# Altium PCB DIOT_Sampler_Adapter.PCBDOC
Units mm, origin at the board's own origin, x right, y up, seen from the top; angles counter-clockwise.
Board outline 33.63 x 98 mm, 4 copper layers (Top, GP1(GND), L3, Bot), stack 1.648 mm thick; 6 components, 9 nets, 26 pads, 0 vias.
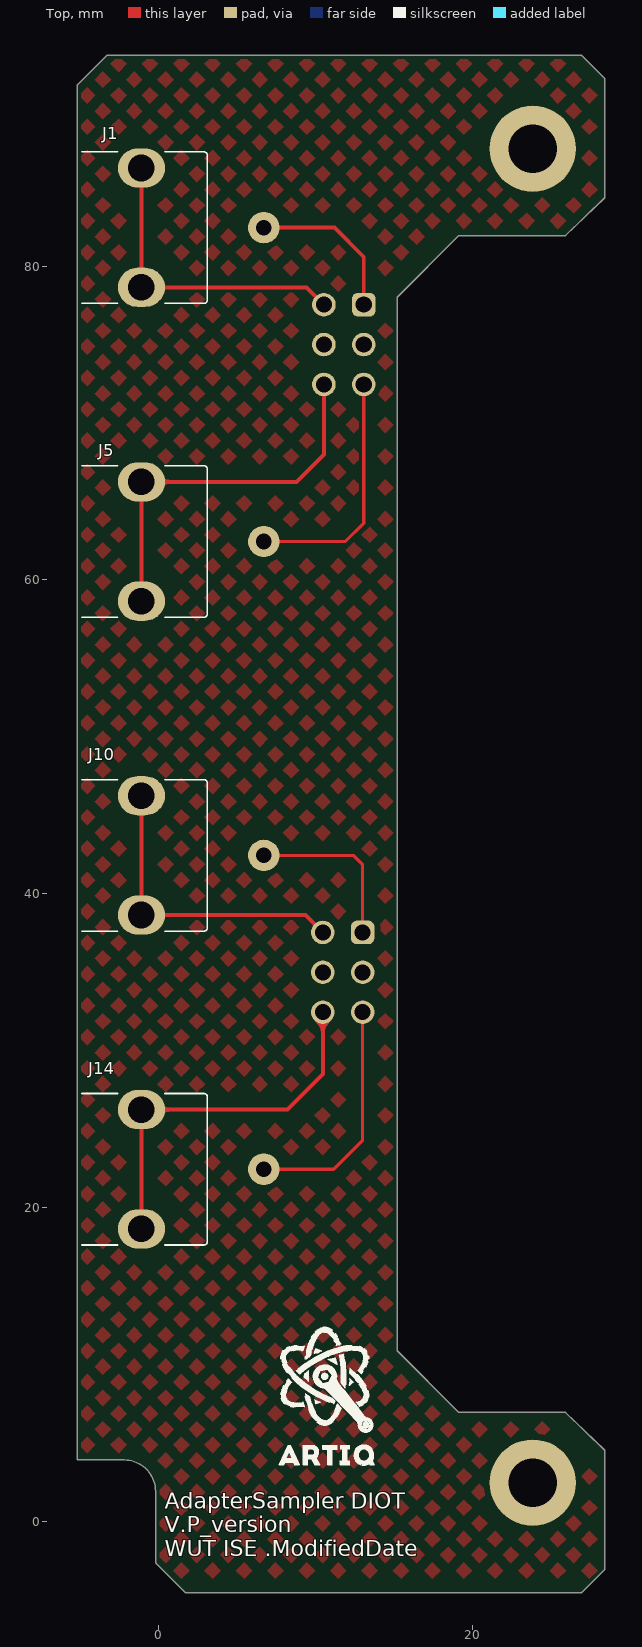
[diagram p0: Top view]
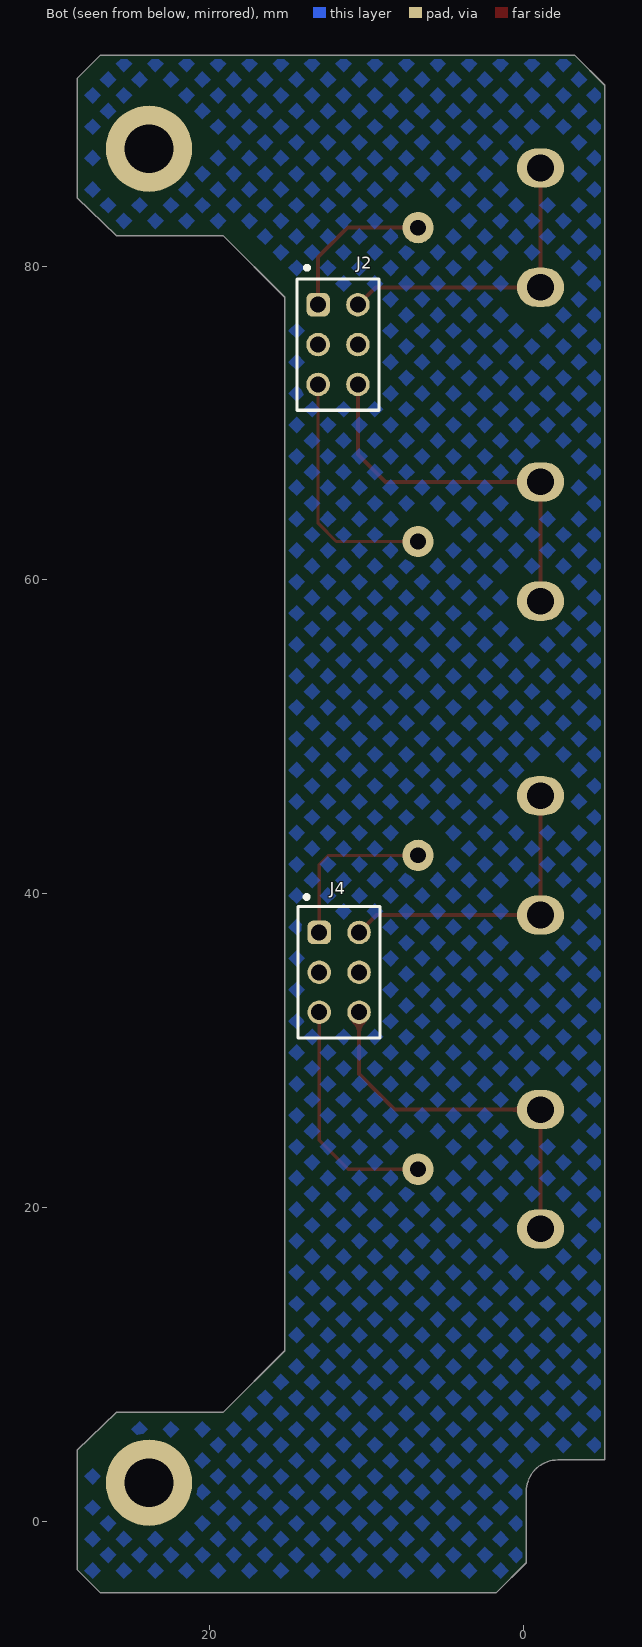
[diagram p1: Bot view, seen from below]
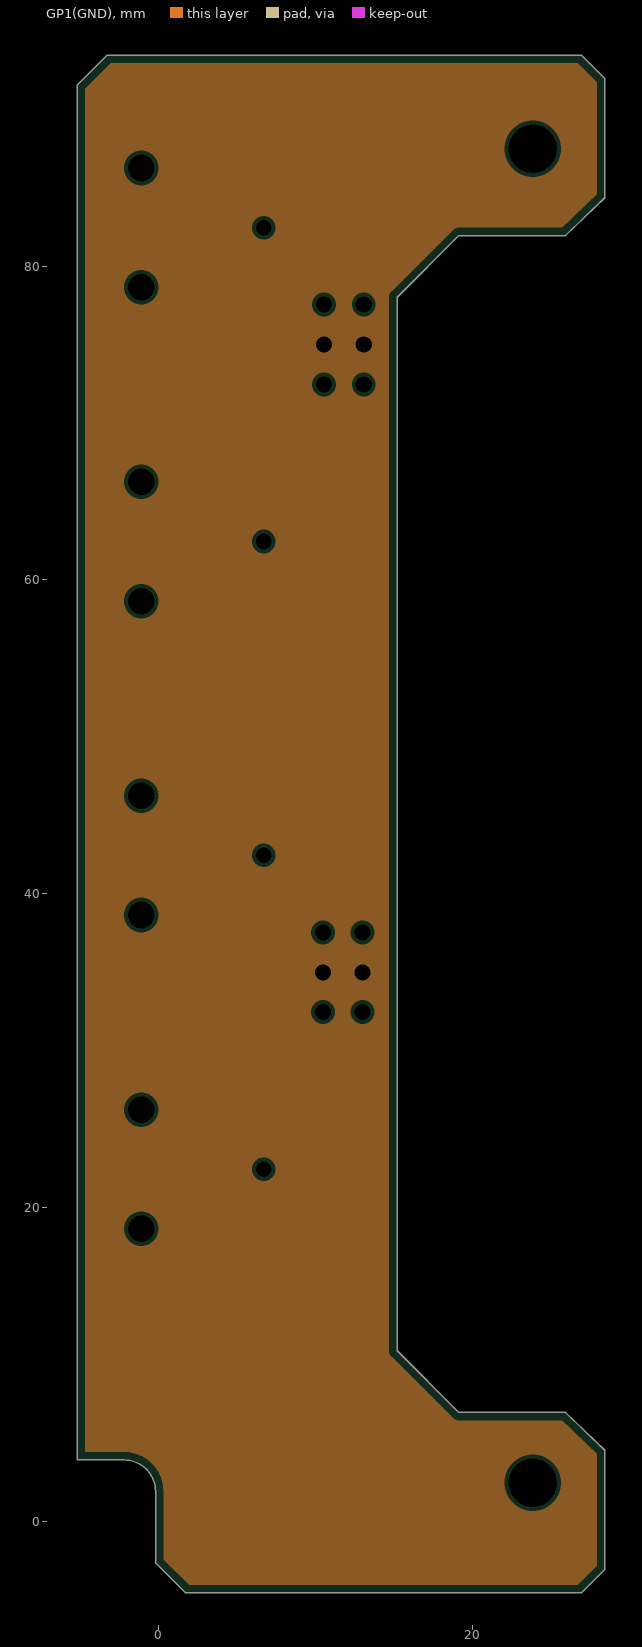
[diagram p2: GP1(GND), clearances drawn from the general rule]
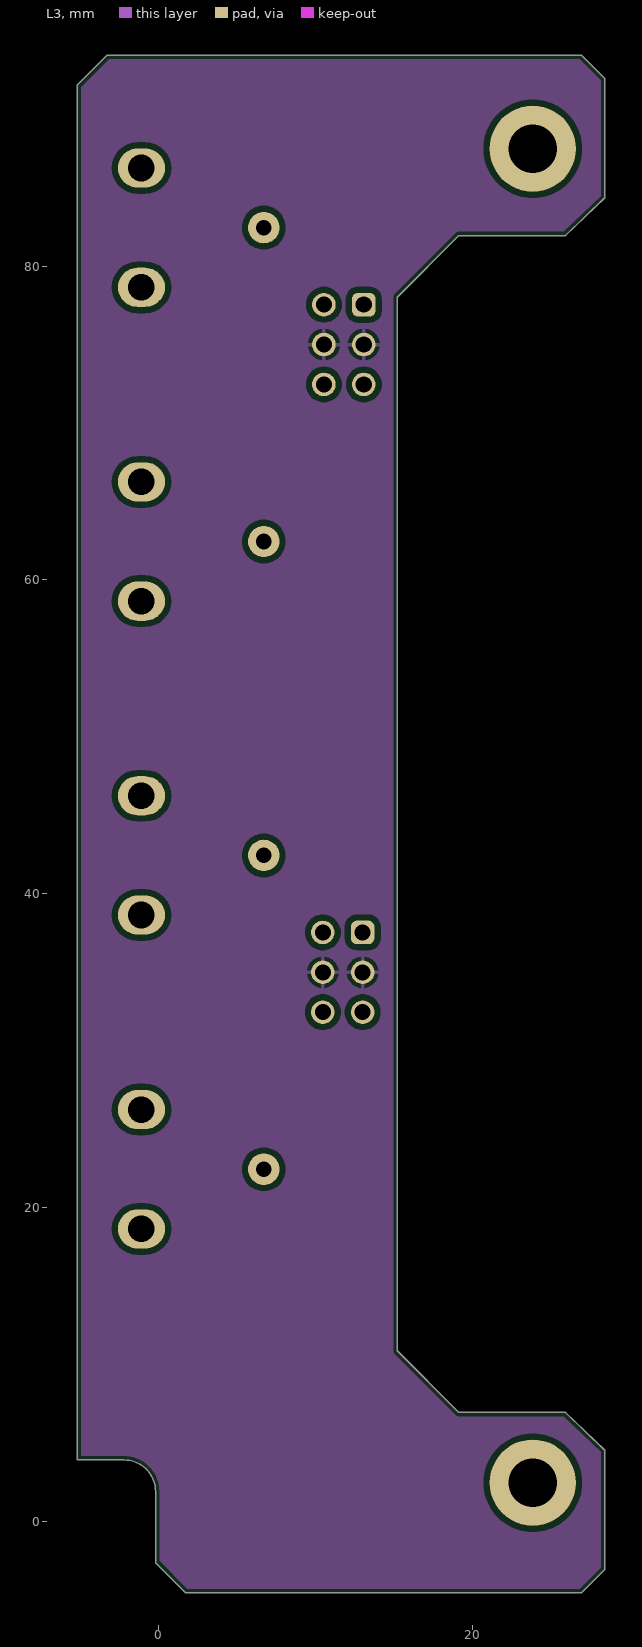
[diagram p3: L3]
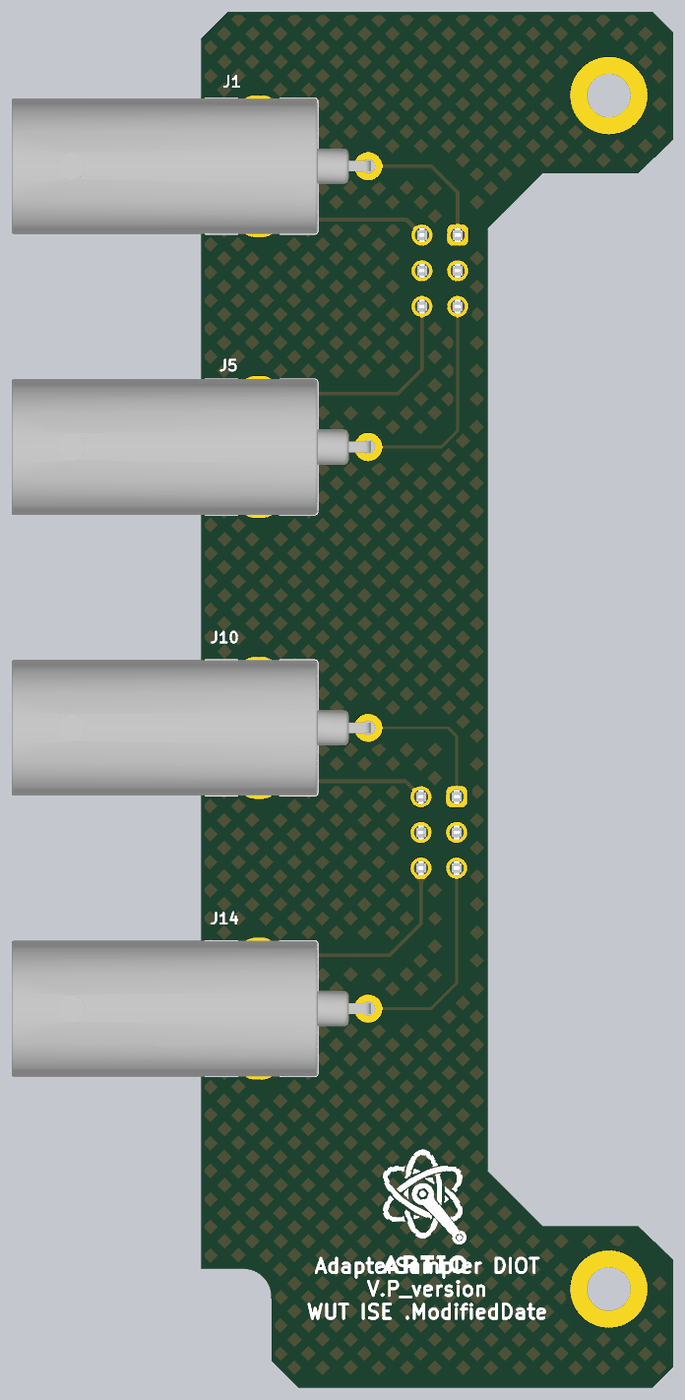
[diagram p4: 3D render of the assembled board from above, using the file's embedded part models]

## Layer stack, top to bottom
TopSolder: solder mask 0.0102, Solder Resist, Dk 3.5
Top: signal copper 0.058
Dielectric1: core 0.18, FR-4, Dk 4.8
GP1(GND): plane copper 0.036, net GND
Dielectric 3: prepreg 1.1, Dk 4.2
L3: signal copper 0.036
Dielectric2: core 0.18, FR-4, Dk 4.2
Bot: signal copper 0.058
BottomSolder: solder mask 0.0102, Solder Resist, Dk 3.5

## Board outline
-0.2,1.925 ccw(c-2.2,1.925) -2.2,3.925 -5.2,3.925 -5.2,91.519 -3.269,93.45 26.93,93.45 28.43,91.95 28.43,84.35 25.93,81.95 19.13,81.95 15.2,78.02 15.2,10.88 19.13,6.95 25.93,6.95 28.43,4.55 28.43,-3.05 26.93,-4.55 1.731,-4.55 -0.2,-2.619

## Design rules (kind name [scope] priority, off if disabled: settings)
AcuteAngle [All] p1: minimum=6.00000000000000E+0001 checktracksonly=FALSE
BoardOutlineClearance [All] p1: gap=0.254 ignorepadtopadclearanceinfootprint=FALSE except(0: Arc-SplitContinuation Track-SplitContinuation SMDPad-SplitContinuation THPad-SplitContinuation Via-SplitContinuation Fill-SplitContinuation Poly-SplitContinuation Region-SplitContinuation Text-SplitContinuation)
Clearance Clearance_DIFF [(InDifferentialPairClass('All Differential Pairs'))] p1: gap=0.127 ignorepadtopadclearanceinfootprint=FALSE except(0: Arc-Hole Track-Hole SMDPad-Hole THPad-Hole Via-Hole Fill-Hole Poly-Hole Region-Hole Text-Hole; 0.254: Arc-Poly Track-Poly SMDPad-Poly THPad-Poly Via-Poly Fill-Poly Poly-Poly Poly-Region Poly-Text)
Clearance [All] p2: gap=0.127 ignorepadtopadclearanceinfootprint=FALSE except(0: Arc-Hole Track-Hole SMDPad-Hole THPad-Hole Via-Hole Fill-Hole Poly-Hole Region-Hole Text-Hole; 0.203: Track-Poly; 0.381: Arc-Poly SMDPad-Poly THPad-Poly Via-Poly Fill-Poly Poly-Poly)
ComponentClearance [All] p1 off: gap=0.254 collisioncheckmode=3 verticalgap=0.254 showdistances=FALSE
DiffPairsRouting [All] p1: maxlimit=0.178 minlimit=0.152 mostfreqgap=0.152 toplayer_minwidth=0.127 toplayer_maxwidth=0.152 toplayer_prefwidth=0.152 midlayer1_minwidth=0.127 midlayer1_maxwidth=0.152 midlayer1_prefwidth=0.152 bottomlayer_minwidth=0.127 bottomlayer_maxwidth=0.152 bottomlayer_prefwidth=0.152 maxuncoupledlength=12.7
FabricationTestPointUsage TestPointUsage [All] p1: valid=0 allowmultiple=FALSE
FabricationTestpoint Testpoint [All] p1: side=3 testpointundercomponent=TRUE minsize=1.016 maxsize=2.54 preferedsize=1.524 minholesize=0.508 maxholesize=1.016 preferedholesize=0.813 testpointgrid=0.025 allowsidetop=TRUE allowsidebottom=TRUE usegrid=TRUE gridtolerance=0
Height [All] p1 off: minheight=0 maxheight=25.4 prefheight=12.7
HoleSize [All] p1: absolutevalues=TRUE maxlimit=3.81 minlimit=0.025 maxpercent=80.000 minpercent=20.000
HoleToHoleClearance [All] p1: gap=0.025 allowstackedmicrovias=TRUE
MinimumSolderMaskSliver [All] p1: minsoldermaskwidth=0
PlaneClearance [All] p1: clearance=0.254
PlaneConnect [All] p1: planeconnectstyle=Direct reliefexpansion=0.508 reliefentries=4 reliefconductorwidth=0.254 reliefairgap=0.254
PolygonConnect PolygonConnect_pad [(InPadClass('All Pads'))] p1: connectstyle=Relief reliefconductorwidth=0.254 reliefentries=4 polygonreliefangle="90 Angle" airgapwidth=0.254
PolygonConnect [All] p2: connectstyle=Direct reliefconductorwidth=0.254 reliefentries=4 polygonreliefangle="45 Angle" airgapwidth=0.254
RoutingVias [All] p1: holewidth=0.2 width=0.5 viastyle="Through Hole" minholewidth=0.2 minwidth=0.5 maxholewidth=0.711 maxwidth=1.27
SilkToSilkClearance [All] p1: silktosilkclearance=0
SilkToSolderMaskClearance SilkscreenOverComponentPads [IsPad] p1: minsilkscreentomaskgap=0 clearancetoexposedcopper=TRUE
SolderMaskExpansion [All] p1: expansion=0.051 istentingtop=FALSE
SupplyNets "Schematic Supply Nets_10" [InNet('GND')] p1: voltage=0.000
Width [All] p1: maxlimit=1.27 minlimit=0.127 preferedwidth=0.127
18 further rules are at their usual default settings.

## Components (designator, comment, footprint, x,y, rotation, side; value= is the part's Value field where it differs from the comment)
J1 "BNC" MOLEX_73251-3150 6.7,82.45 r0 top
J2 "61300621821" 61300621821 11.8,75 r270 bottom
J4 "61300621821" 61300621821 11.73,35 r270 bottom
J5 "BNC" MOLEX_73251-3150 6.7,62.45 r0 top
J10 "BNC" MOLEX_73251-3150 6.7,42.45 r0 top
J14 "BNC" MOLEX_73251-3150 6.7,22.45 r0 top

## Footprints (in the part's own frame and the unit in brackets; to place one, negate y for a bottom-side part, rotate by r counter-clockwise, add the part's x,y. Pads: shape width x height; smd on the part's side, far side on the other; paste and mask are expansions set on the pad)
61300621821 [mm] "Socket Header, Pitch 2.54 mm, THT, Vertical, dual row, 6p"
  rrect50% 1.5x1.5 hole 1.02: 1(-2.54,-1.27)
  round 1.5 hole 1.02: 2(-2.54,1.27) 3(0,-1.27) 4(0,1.27) 5(2.54,-1.27) 6(2.54,1.27)
  silkscreen extent -5.02,-2.62 4.19,2.62, body extent -4.06,-2.54 4.06,2.54, height 8.45
MOLEX_73251-3150 [mm]
  round 2 hole 1: 1(0,0)
  oval 3x2.5 hole 1.7: 2(-7.8,-3.8) 2(-7.8,3.8)
  silkscreen extent -11.6,-4.83 -3.6,4.83, body extent -25.4,-4.82 0.15,4.82, height 9.3

## Part data
J1 J5 J10 J14: library part MOLEX_73251-3150, Manufacturer=MOLEX, Manufacturer Part Number=73251-3150, Author="CERN DEM JLC", Component Type=Standard, CreateDate=19.09.2024, Family=BNC, HelpURL=\\cern.ch\dfs\Applications\Altium\Datasheets\MOLEX_73251-2121.pdf, LatestRevisionDate=19.09.2024, Mounted=Yes, Part Description="RF Connectors / Coaxial Connectors BNC RA PCB RECPT 50 OHM", Part Number=MOLEX_73251-3150, Pin Count=5, PressFit=No, Sense=No, SMD=No, Socket=No, Status=None
J2 J4: "WR-PHD Socket Header, THT, Vertical, pitch 2.54mm, 2 Row, 6P", Contact Resistance=20mOhm, Manufacturer="Wurth Elektronik", Operating Temperature Max=125°C, Operating Temperature Min=-40°C, Rated Current=3A, Withstanding Voltage=500V, Working Voltage=250V, Category="Board-to-Board Connectors", ComponentLink1Description="Website Link", ComponentLink1URL=https://www.we-online.com/redexpert/article/61300621821?ad, ComponentLink2Description="Datasheet Link", ComponentLink2URL=https://www.we-online.com/redexpert/spec/61300621821?ad, Gender="Socket Header", Manufacturer Part Number=61300621821, Match Code=WR-PHD, Mount="Through Hole", Number of Pins=6, Number of Rows=2, Orientation=Vertical, Packaging=Tray, Pitch=2.54mm

## Free pads (board coordinates)
  round 5.5 hole 3.1: MH(23.844,2.48) MH(23.844,87.48)

## Nets (pads, with @x,y where several pads share a name; then routed paths per layer and width w, separated by ;. In a path a pad name is that pad's centre, name@x,y a point inside that pad or via, vN(x,y) a via of type N, cw(c..) or ccw(c..) an arc to the next point about the centre after c; other vN are vias at no path point)
ADC_IN_N0: J1.2 J2.2 | length 19.7
  Top w0.254: J1.2@-1.1,86.25 -1.1,78.65 9.42,78.65 J2.2
ADC_IN_N2: J2.6 J5.2 | length 24.4
  Top w0.254: J5.2@-1.1,58.65 -1.1,66.25 8.775,66.25 10.53,68.005 J2.6
ADC_IN_N4: J4.2 J10.2 | length 19.6
  Top w0.254: J10.2@-1.1,46.25 -1.1,38.65 9.35,38.65 J4.2
ADC_IN_N6: J4.6 J14.2 | length 24
  Top w0.254: J14.2@-1.1,18.65 -1.1,26.25 8.2,26.25 10.46,28.51 J4.6
ADC_IN_P0: J1.1 J2.1 | length 10.2
  Top w0.254: J1.1 11.2,82.45 13.07,80.58 J2.1
ADC_IN_P2: J2.5 J5.1 | length 15.7
  Top w0.203: J5.1 11.9,62.45 13.07,63.62 J2.5
ADC_IN_P4: J4.1 J10.1 | length 10.9
  Top w0.203: J10.1 12.4,42.45 13,41.85 J4.1
ADC_IN_P6: J4.5 J14.1 | length 15.2
  Top w0.203: J14.1 11.15,22.45 13,24.3 J4.5
GND: J2.3 J2.4 J4.3 J4.4

## Polygon pours and split planes (outlines as drawn)
GND on Bot "GND_L04_P033" (solid, pour order 33): -2.269,94.45 -5.2,91.519 -5.2,-2.619 -2.269,-5.55 25.93,-5.55 28.43,-3.05 28.43,4.55 28.33,4.55 25.93,6.95 19.13,6.95 15.2,10.88 15.2,78.02 19.13,81.95 26.03,81.95 28.43,84.35 28.43,91.95 25.93,94.45
GND on L3 "GND_L03_P032" (solid, pour order 32): -2.269,94.45 -5.2,91.519 -5.2,-2.619 -2.269,-5.55 25.93,-5.55 28.43,-3.05 28.43,4.55 28.33,4.55 25.93,6.95 19.13,6.95 15.2,10.88 15.2,78.02 19.13,81.95 26.03,81.95 28.43,84.35 28.43,91.95 25.93,94.45
GND on Top "GND_L01_P028" (solid, pour order 28): -2.269,94.45 -5.2,91.519 -5.2,-2.619 -2.269,-5.55 25.93,-5.55 28.43,-3.05 28.43,4.55 28.33,4.55 25.93,6.95 19.13,6.95 15.2,10.88 15.2,78.02 19.13,81.95 26.03,81.95 28.43,84.35 28.43,91.95 25.93,94.45
GND on GP1(GND) (split plane): 27.92,91.739 27.92,84.568 25.725,82.46 19.13,82.46 19.03,82.451 18.935,82.422 18.846,82.374 18.769,82.311 14.839,78.381 14.776,78.304 14.728,78.215 14.699,78.12 14.69,78.02 14.69,10.88 14.699,10.78 14.728,10.685 14.776,10.596 14.839,10.519 18.769,6.589 18.846,6.526 18.935,6.478 19.03,6.449 19.13,6.44 25.725,6.44 27.92,4.332 27.92,-2.839 26.719,-4.04 1.942,-4.04 0.31,-2.408 0.31,1.925 0.31,1.926 0.301,2.144 0.272,2.361 0.225,2.575 0.159,2.784 0.075,2.986 -0.026,3.18 -0.144,3.365 -0.277,3.539 -0.425,3.7 -0.586,3.848 -0.76,3.981 -0.945,4.099 -1.139,4.2 -1.341,4.284 -1.55,4.35 -1.764,4.397 -1.981,4.426 -2.199,4.435 -2.2,4.435 -4.69,4.435 -4.69,91.308 -3.058,92.94 26.719,92.94

## Keep-outs
KeepOutLayer:
  lines w0.254: -13.883,165.207 14.444,136.88 ; -13.883,167.207 14.444,138.88 ; -13.883,197.207 14.444,168.88 ; -13.883,199.207 14.444,170.88 ; -13.883,229.207 14.444,200.88 ; -13.883,231.207 14.444,202.88 ; -13.883,261.207 14.444,232.88 ; -13.883,263.207 14.444,234.88 ; -13.883,289.207 14.444,260.88 ; -13.883,291.207 14.444,262.88 ; -13.556,134.88 14.444,162.88 ; -13.556,164.88 -9.556,168.88 14.444,192.88 ; -13.556,166.88 14.444,194.88 ; -13.556,196.88 -9.556,200.88 14.444,224.88 ; -13.556,198.88 14.444,226.88 ; -13.556,228.88 -9.556,232.88 14.444,256.88 ; -13.556,230.88 14.444,258.88 ; -13.556,288.88 -9.556,292.88 ; -13.556,292.88 -11.556,290.88 14.444,264.88 ; -11.556,134.88 -13.556,136.88 14.444,164.88 ; -11.556,136.88 -13.556,138.88 14.444,166.88 ; -11.556,258.88 -13.556,260.88 ; -11.556,260.88 -13.556,262.88 14.444,290.88 ; -11.556,262.88 14.444,236.88 ; -11.556,264.88 14.444,238.88 ; -11.556,292.88 14.444,266.88 ; -9.556,134.88 14.444,158.88 ; -9.556,136.88 14.444,160.88 ; -9.556,258.88 14.444,282.88 ; -9.556,260.88 14.444,284.88 ; -9.556,262.88 -13.556,258.88 ; -9.556,264.88 -13.556,260.88 ; -9.556,290.88 -13.556,286.88 12.444,260.88 ; -7.556,134.88 -13.556,140.88 14.444,168.88 ; -7.556,136.88 -13.556,142.88 10.444,166.88 ; -7.556,258.88 -13.556,264.88 14.444,292.88 ; -7.556,260.88 -13.556,266.88 10.444,290.88 ; -7.556,262.88 14.444,240.88 ; -7.556,264.88 14.444,242.88 ; -7.556,290.88 14.444,268.88 ; -7.556,292.88 14.444,270.88 ; -5.556,134.88 14.444,154.88 ; -5.556,136.88 14.444,156.88 ; -5.556,258.88 14.444,278.88 ; -5.556,260.88 14.444,280.88 ; -5.556,262.88 -13.556,254.88 8.444,232.88 14.444,226.88 ; -5.556,264.88 -13.556,256.88 12.444,230.88 14.444,228.88 ; -5.556,290.88 -13.556,282.88 8.444,260.88 ; -5.556,292.88 -13.556,284.88 12.444,258.88 ; -3.556,134.88 -13.556,144.88 10.444,168.88 ; -3.556,136.88 -13.556,146.88 -11.556,148.88 ; -3.556,258.88 -13.556,268.88 10.444,292.88 ; -3.556,260.88 -13.556,270.88 -11.556,272.88 ; -1.556,134.88 14.444,150.88 ; -1.556,136.88 14.444,152.88 ; -1.556,258.88 14.444,274.88 ; -1.556,260.88 14.444,276.88 ; 0.444,134.88 -13.556,148.88 -11.556,150.88 ; 0.444,136.88 -13.556,150.88 -11.556,152.88 ; 0.444,258.88 -13.556,272.88 -11.556,274.88 ; 0.444,260.88 -13.556,274.88 -11.556,276.88 ; 0.444,262.88 14.444,248.88 ; 0.444,264.88 14.444,250.88 ; 0.444,290.88 14.444,276.88 ; 0.444,292.88 14.444,278.88 ; 2.444,134.88 14.444,146.88 ; 2.444,136.88 14.444,148.88 ; 2.444,258.88 14.444,270.88 ; 2.444,260.88 14.444,272.88 ; 2.444,262.88 -11.556,248.88 ; 2.444,264.88 -11.556,250.88 ; 2.444,290.88 -11.556,276.88 ; 2.444,292.88 -11.556,278.88 ; 4.444,134.88 -13.556,152.88 -11.556,154.88 ; 4.444,136.88 -13.556,154.88 -1.556,166.88 ; 4.444,258.88 -13.556,276.88 -11.556,278.88 ; 4.444,260.88 -13.556,278.88 -1.556,290.88 ; 6.444,134.88 14.444,142.88 ; 6.444,136.88 14.444,144.88 ; 6.444,258.88 14.444,266.88 ; 6.444,260.88 14.444,268.88 ; 6.444,262.88 -11.556,244.88 ; 6.444,264.88 -11.556,246.88 ; 6.444,290.88 -11.556,272.88 ; 6.444,292.88 -11.556,274.88 ; 8.444,134.88 -13.556,156.88 -1.556,168.88 ; 8.444,136.88 -13.556,158.88 -5.556,166.88 14.444,186.88 ; 8.444,258.88 -13.556,280.88 -1.556,292.88 ; 8.444,262.88 14.444,256.88 ; 8.444,264.88 14.444,258.88 ; 8.444,290.88 14.444,284.88 ; 8.444,292.88 14.444,286.88 ; 10.444,134.88 14.444,138.88 ; 10.444,136.88 14.444,140.88 ; 10.444,258.88 14.444,262.88 ; 10.444,260.88 14.444,264.88 ; 12.444,134.88 -13.556,160.88 -5.556,168.88 14.444,188.88 ; 12.444,136.88 -13.556,162.88 -9.556,166.88 14.444,190.88 ; 12.444,262.88 14.444,260.88 ; 12.444,264.88 14.444,262.88 ; 12.444,290.88 14.444,288.88 ; 12.444,292.88 14.444,290.88 ; 14.117,165.207 42.444,136.88 ; 14.117,167.207 42.444,138.88 ; 14.117,197.207 42.444,168.88 ; 14.117,199.207 42.444,170.88 ; 14.117,229.207 42.444,200.88 ; 14.117,231.207 42.444,202.88 ; 14.117,261.207 42.444,232.88 ; 14.117,263.207 42.444,234.88 ; 14.117,289.207 42.444,260.88 ; 14.117,291.207 42.444,262.88 ; 14.444,134.88 42.444,162.88 ; 16.444,134.88 14.444,136.88 ; 16.444,136.88 14.444,138.88 ; 16.444,258.88 14.444,260.88 ; 16.444,260.88 14.444,262.88 ; 16.444,262.88 42.444,236.88 ; 16.444,264.88 42.444,238.88 ; 16.444,292.88 42.444,266.88 ; 18.444,134.88 42.444,158.88 ; 18.444,136.88 42.444,160.88 ; 18.444,258.88 42.444,282.88 ; 18.444,260.88 42.444,284.88 ; 18.444,262.88 14.444,258.88 ; 18.444,264.88 14.444,260.88 ; 18.444,290.88 14.444,286.88 ; 18.444,292.88 14.444,288.88 ; 20.444,134.88 14.444,140.88 ; 20.444,136.88 14.444,142.88 ; 20.444,258.88 14.444,264.88 ; 20.444,260.88 14.444,266.88 ; 20.444,262.88 42.444,240.88 ; 20.444,264.88 42.444,242.88 ; 20.444,290.88 42.444,268.88 ; 20.444,292.88 42.444,270.88 ; 22.444,134.88 42.444,154.88 ; 22.444,136.88 42.444,156.88 ; 22.444,258.88 42.444,278.88 ; 22.444,260.88 42.444,280.88 ; 22.444,262.88 14.444,254.88 ; 22.444,264.88 14.444,256.88 ; 22.444,290.88 14.444,282.88 ; 22.444,292.88 14.444,284.88 ; 24.444,134.88 14.444,144.88 ; 24.444,136.88 14.444,146.88 ; 24.444,258.88 14.444,268.88 ; 24.444,260.88 14.444,270.88 ; 26.444,134.88 42.444,150.88 ; 26.444,136.88 42.444,152.88 ; 26.444,258.88 42.444,274.88 ; 26.444,260.88 42.444,276.88 ; 28.444,134.88 14.444,148.88 ; 28.444,136.88 14.444,150.88 ; 28.444,258.88 14.444,272.88 ; 28.444,260.88 14.444,274.88 ; 28.444,262.88 42.444,248.88 ; 28.444,264.88 42.444,250.88 ; 28.444,290.88 42.444,276.88 ; 28.444,292.88 42.444,278.88 ; 30.444,134.88 42.444,146.88 ; 30.444,136.88 42.444,148.88 ; 30.444,258.88 42.444,270.88 ; 30.444,260.88 42.444,272.88 ; 30.444,262.88 16.444,248.88 ; 30.444,264.88 16.444,250.88 ; 30.444,290.88 16.444,276.88 ; 30.444,292.88 16.444,278.88 ; 32.444,134.88 14.444,152.88 ; 32.444,136.88 14.444,154.88 ; 32.444,258.88 14.444,276.88 ; 32.444,260.88 14.444,278.88 ; 34.444,134.88 42.444,142.88 ; 34.444,136.88 42.444,144.88 ; 34.444,258.88 42.444,266.88 ; 34.444,260.88 42.444,268.88 ; 34.444,262.88 16.444,244.88 ; 34.444,264.88 16.444,246.88 ; 34.444,290.88 16.444,272.88 ; 34.444,292.88 16.444,274.88 ; 36.444,134.88 14.444,156.88 ; 36.444,136.88 14.444,158.88 ; 36.444,258.88 14.444,280.88 ; 36.444,260.88 14.444,282.88 ; 36.444,262.88 42.444,256.88 ; 36.444,264.88 42.444,258.88 ; 36.444,290.88 42.444,284.88 ; 36.444,292.88 42.444,286.88 ; 38.444,134.88 42.444,138.88 ; 38.444,136.88 42.444,140.88 ; 38.444,258.88 42.444,262.88 ; 38.444,260.88 42.444,264.88 ; 40.444,134.88 14.444,160.88 ; 40.444,136.88 14.444,162.88 ; 40.444,258.88 14.444,284.88 ; 40.444,260.88 14.444,286.88 ; 40.444,262.88 42.444,260.88 ; 40.444,264.88 42.444,262.88 ; 40.444,290.88 42.444,288.88 ; 40.444,292.88 42.444,290.88 ; 42.117,165.207 70.444,136.88 ; 42.117,167.207 70.444,138.88 ; 42.117,197.207 70.444,168.88 42.444,140.88 ; 42.117,199.207 70.444,170.88 ; 42.117,229.207 70.444,200.88 42.444,172.88 ; 42.117,231.207 70.444,202.88 ; 42.117,261.207 70.444,232.88 42.444,204.88 ; 42.117,263.207 70.444,234.88 ; 42.117,289.207 70.444,260.88 42.444,232.88 ; 42.117,291.207 70.444,262.88 42.444,234.88 ; 42.444,134.88 70.444,162.88 ; 44.444,134.88 42.444,136.88 ; 44.444,136.88 42.444,138.88 ; 44.444,258.88 42.444,260.88 ; 44.444,260.88 42.444,262.88 ; 44.444,262.88 70.444,236.88 ; 44.444,264.88 70.444,238.88 ; 44.444,292.88 70.444,266.88 ; 46.444,134.88 70.444,158.88 60.444,168.88 ; 46.444,136.88 70.444,160.88 ; 46.444,258.88 70.444,282.88 60.444,292.88 ; 46.444,260.88 70.444,284.88 ; 46.444,262.88 42.444,258.88 ; 46.444,264.88 42.444,260.88 ; 46.444,290.88 42.444,286.88 ; 46.444,292.88 42.444,288.88 ; 48.444,134.88 42.444,140.88 ; 48.444,136.88 42.444,142.88 ; 48.444,258.88 42.444,264.88 ; 48.444,260.88 42.444,266.88 ; 48.444,262.88 70.444,240.88 ; 48.444,264.88 70.444,242.88 58.444,230.88 44.444,216.88 ; 48.444,290.88 70.444,268.88 ; 48.444,292.88 70.444,270.88 58.444,258.88 ; 50.444,134.88 70.444,154.88 56.444,168.88 42.444,182.88 ; 50.444,136.88 70.444,156.88 60.444,166.88 ; 50.444,258.88 70.444,278.88 56.444,292.88 ; 50.444,260.88 70.444,280.88 60.444,290.88 ; 50.444,262.88 42.444,254.88 ; 50.444,264.88 42.444,256.88 ; 50.444,290.88 42.444,282.88 ; 50.444,292.88 42.444,284.88 ; 52.444,134.88 42.444,144.88 ; 52.444,136.88 42.444,146.88 ; 52.444,258.88 42.444,268.88 ; 52.444,260.88 42.444,270.88 ; 54.444,134.88 70.444,150.88 52.444,168.88 ; 54.444,136.88 70.444,152.88 56.444,166.88 42.444,180.88 ; 54.444,258.88 70.444,274.88 52.444,292.88 ; 54.444,260.88 70.444,276.88 56.444,290.88 ; 56.444,134.88 42.444,148.88 ; 56.444,136.88 42.444,150.88 ; 56.444,258.88 42.444,272.88 ; 56.444,260.88 42.444,274.88 ; 56.444,262.88 70.444,248.88 54.444,232.88 ; 56.444,264.88 70.444,250.88 50.444,230.88 42.444,222.88 ; 58.444,134.88 70.444,146.88 48.444,168.88 42.444,174.88 ; 58.444,136.88 70.444,148.88 52.444,166.88 ; 58.444,260.88 70.444,272.88 52.444,290.88 ; 58.444,262.88 44.444,248.88 ; 58.444,264.88 44.444,250.88 ; 58.444,290.88 44.444,276.88 ; 58.444,292.88 44.444,278.88 ; 60.444,134.88 42.444,152.88 ; 60.444,136.88 42.444,154.88 ; 60.444,258.88 42.444,276.88 ; 60.444,260.88 42.444,278.88 ; 62.444,290.88 44.444,272.88 ; 62.444,292.88 44.444,274.88 ; 62.444,166.88 44.444,148.88 ; 62.444,168.88 44.444,150.88 ; 62.444,198.88 44.444,180.88 ; 62.444,200.88 44.444,182.88 ; 62.444,230.88 44.444,212.88 ; 62.444,232.88 44.444,214.88 ; 62.444,262.88 44.444,244.88 ; 62.444,264.88 44.444,246.88 ; 64.444,134.88 42.444,156.88 ; 64.444,136.88 42.444,158.88 ; 64.444,166.88 42.444,188.88 ; 64.444,168.88 42.444,190.88 ; 64.444,198.88 42.444,220.88 ; 64.444,200.88 42.444,222.88 ; 64.444,230.88 42.444,252.88 ; 64.444,232.88 42.444,254.88 ; 64.444,258.88 42.444,280.88 ; 64.444,260.88 42.444,282.88 ; 66.444,166.88 42.444,142.88 ; 66.444,168.88 42.444,144.88 ; 66.444,198.88 42.444,174.88 ; 66.444,200.88 42.444,176.88 ; 66.444,230.88 42.444,206.88 ; 66.444,232.88 42.444,208.88 ; 66.444,262.88 42.444,238.88 ; 66.444,264.88 42.444,240.88 ; 66.444,290.88 42.444,266.88 ; 66.444,292.88 42.444,268.88 ; 68.444,134.88 42.444,160.88 ; 68.444,136.88 42.444,162.88 ; 68.444,166.88 42.444,192.88 ; 68.444,168.88 42.444,194.88 ; 68.444,198.88 42.444,224.88 ; 68.444,200.88 42.444,226.88 ; 68.444,230.88 42.444,256.88 ; 68.444,232.88 42.444,258.88 ; 68.444,258.88 42.444,284.88 ; 68.444,260.88 42.444,286.88 ; 70.444,140.88 44.444,166.88 42.444,168.88 ; 70.444,142.88 44.444,168.88 42.444,170.88 ; 70.444,144.88 48.444,166.88 42.444,172.88 ; 70.444,164.88 42.444,136.88 ; 70.444,166.88 42.444,138.88 ; 70.444,172.88 44.444,198.88 42.444,200.88 ; 70.444,174.88 44.444,200.88 42.444,202.88 ; 70.444,176.88 48.444,198.88 42.444,204.88 ; 70.444,192.88 46.444,168.88 42.444,164.88 ; 70.444,194.88 42.444,166.88 ; 70.444,196.88 42.444,168.88 ; 70.444,198.88 42.444,170.88 ; 70.444,204.88 44.444,230.88 42.444,232.88 ; 70.444,206.88 44.444,232.88 42.444,234.88 ; 70.444,208.88 48.444,230.88 42.444,236.88 ; 70.444,224.88 46.444,200.88 42.444,196.88 ; 70.444,226.88 42.444,198.88 ; 70.444,228.88 42.444,200.88 ; 70.444,230.88 42.444,202.88 ; 70.444,256.88 46.444,232.88 42.444,228.88 ; 70.444,258.88 42.444,230.88 ; 70.444,286.88 42.444,258.88 ; 70.444,288.88 42.444,260.88 ; 70.444,290.88 42.444,262.88 ; 70.444,292.88 42.444,264.88 ; -13.556,258.88 14.444,286.88 ; -13.556,258.88 12.444,232.88 14.444,230.88 ; -13.556,260.88 14.444,288.88 ; -11.556,148.88 -11.556,148.88 ; -11.556,148.88 6.444,166.88 14.444,174.88 ; -11.556,150.88 6.444,168.88 14.444,176.88 ; -11.556,150.88 -11.556,150.88 ; -11.556,152.88 2.444,166.88 14.444,178.88 ; -11.556,152.88 -11.556,152.88 ; -11.556,154.88 2.444,168.88 14.444,180.88 ; -11.556,154.88 -11.556,154.88 ; -11.556,180.88 -11.556,180.88 ; -11.556,180.88 6.444,198.88 14.444,206.88 ; -11.556,180.88 -13.556,178.88 -3.556,168.88 ; -11.556,182.88 -13.556,180.88 0.444,166.88 14.444,152.88 ; -11.556,182.88 -11.556,182.88 ; -11.556,182.88 6.444,200.88 14.444,208.88 ; -11.556,184.88 -11.556,184.88 ; -11.556,184.88 -13.556,182.88 0.444,168.88 14.444,154.88 ; -11.556,184.88 2.444,198.88 14.444,210.88 ; -11.556,186.88 -11.556,186.88 ; -11.556,186.88 2.444,200.88 14.444,212.88 ; -11.556,186.88 -13.556,184.88 4.444,166.88 ; -11.556,212.88 -13.556,210.88 -3.556,200.88 ; -11.556,212.88 6.444,230.88 14.444,238.88 ; -11.556,212.88 -11.556,212.88 ; -11.556,214.88 -11.556,214.88 ; -11.556,214.88 6.444,232.88 14.444,240.88 ; -11.556,214.88 -13.556,212.88 0.444,198.88 14.444,184.88 ; -11.556,216.88 2.444,230.88 14.444,242.88 ; -11.556,216.88 -13.556,214.88 0.444,200.88 14.444,186.88 ; -11.556,216.88 -11.556,216.88 ; -11.556,218.88 2.444,232.88 14.444,244.88 ; -11.556,218.88 -11.556,218.88 ; -11.556,218.88 -13.556,216.88 4.444,198.88 ; -11.556,244.88 -11.556,244.88 ; -11.556,244.88 -13.556,242.88 -3.556,232.88 ; -11.556,246.88 -13.556,244.88 0.444,230.88 14.444,216.88 ; -11.556,246.88 -11.556,246.88 ; -11.556,248.88 -13.556,246.88 0.444,232.88 14.444,218.88 ; -11.556,248.88 -11.556,248.88 ; -11.556,250.88 -11.556,250.88 ; -11.556,250.88 -13.556,248.88 4.444,230.88 ; -11.556,272.88 -11.556,272.88 ; -11.556,274.88 -11.556,274.88 ; -11.556,276.88 -11.556,276.88 ; -11.556,278.88 -11.556,278.88 ; -3.556,166.88 14.444,148.88 ; -3.556,166.88 -3.556,166.88 ; -3.556,166.88 -13.556,176.88 10.444,200.88 ; -3.556,168.88 -3.556,168.88 ; -3.556,168.88 14.444,150.88 ; -3.556,198.88 14.444,180.88 ; -3.556,198.88 -13.556,208.88 10.444,232.88 ; -3.556,198.88 -3.556,198.88 ; -3.556,200.88 14.444,182.88 ; -3.556,200.88 -3.556,200.88 ; -3.556,230.88 -13.556,240.88 10.444,264.88 ; -3.556,230.88 -3.556,230.88 ; -3.556,230.88 14.444,212.88 ; -3.556,232.88 -3.556,232.88 ; -3.556,232.88 14.444,214.88 ; -3.556,262.88 14.444,244.88 ; -3.556,262.88 -3.556,262.88 ; -3.556,264.88 -3.556,264.88 ; -3.556,264.88 14.444,246.88 ; -3.556,290.88 -3.556,290.88 ; -3.556,290.88 14.444,272.88 ; -3.556,292.88 14.444,274.88 ; -3.556,292.88 -3.556,292.88 ; -1.556,166.88 -1.556,166.88 ; -1.556,166.88 14.444,182.88 ; -1.556,168.88 -1.556,168.88 ; -1.556,168.88 14.444,184.88 ; -1.556,198.88 14.444,214.88 ; -1.556,198.88 -1.556,198.88 ; -1.556,198.88 -13.556,186.88 4.444,168.88 ; -1.556,200.88 -1.556,200.88 ; -1.556,200.88 -13.556,188.88 8.444,166.88 14.444,160.88 ; -1.556,200.88 14.444,216.88 ; -1.556,230.88 14.444,246.88 ; -1.556,230.88 -13.556,218.88 4.444,200.88 ; -1.556,230.88 -1.556,230.88 ; -1.556,232.88 14.444,248.88 ; -1.556,232.88 -1.556,232.88 ; -1.556,232.88 -13.556,220.88 8.444,198.88 14.444,192.88 ; -1.556,262.88 -1.556,262.88 ; -1.556,262.88 -13.556,250.88 4.444,232.88 ; -1.556,264.88 -13.556,252.88 8.444,230.88 14.444,224.88 ; -1.556,264.88 -1.556,264.88 ; -1.556,290.88 -1.556,290.88 ; -1.556,292.88 -1.556,292.88 ; 4.444,166.88 14.444,156.88 ; 4.444,166.88 4.444,166.88 ; 4.444,168.88 14.444,158.88 ; 4.444,168.88 4.444,168.88 ; 4.444,198.88 4.444,198.88 ; 4.444,198.88 14.444,188.88 ; 4.444,200.88 4.444,200.88 ; 4.444,200.88 14.444,190.88 ; 4.444,230.88 4.444,230.88 ; 4.444,230.88 14.444,220.88 ; 4.444,232.88 14.444,222.88 ; 4.444,232.88 4.444,232.88 ; 4.444,262.88 14.444,252.88 ; 4.444,262.88 4.444,262.88 ; 4.444,264.88 4.444,264.88 ; 4.444,264.88 14.444,254.88 ; 4.444,290.88 14.444,280.88 ; 4.444,290.88 4.444,290.88 ; 4.444,292.88 14.444,282.88 ; 4.444,292.88 4.444,292.88 ; 10.444,166.88 14.444,170.88 ; 10.444,166.88 10.444,166.88 ; 10.444,168.88 10.444,168.88 ; 10.444,168.88 14.444,172.88 ; 10.444,198.88 14.444,202.88 ; 10.444,198.88 10.444,198.88 ; 10.444,198.88 -13.556,174.88 -7.556,168.88 14.444,146.88 ; 10.444,200.88 14.444,204.88 ; 10.444,200.88 10.444,200.88 ; 10.444,230.88 10.444,230.88 ; 10.444,230.88 -13.556,206.88 -7.556,200.88 14.444,178.88 ; 10.444,230.88 14.444,234.88 ; 10.444,232.88 10.444,232.88 ; 10.444,232.88 14.444,236.88 ; 10.444,262.88 10.444,262.88 ; 10.444,262.88 -13.556,238.88 -7.556,232.88 14.444,210.88 ; 10.444,264.88 10.444,264.88 ; 10.444,290.88 10.444,290.88 ; 10.444,292.88 10.444,292.88 ; 14.444,136.88 42.444,164.88 ; 14.444,138.88 14.444,138.88 ; 14.444,138.88 42.444,166.88 ; 14.444,140.88 14.444,140.88 ; 14.444,140.88 42.444,168.88 ; 14.444,140.88 -11.556,166.88 -13.556,168.88 14.444,196.88 ; 14.444,142.88 38.444,166.88 ; 14.444,142.88 -11.556,168.88 -13.556,170.88 14.444,198.88 ; 14.444,144.88 38.444,168.88 ; 14.444,144.88 -7.556,166.88 -13.556,172.88 14.444,200.88 ; 14.444,146.88 16.444,148.88 ; 14.444,148.88 16.444,150.88 ; 14.444,150.88 16.444,152.88 ; 14.444,152.88 16.444,154.88 ; 14.444,154.88 26.444,166.88 ; 14.444,156.88 26.444,168.88 ; 14.444,158.88 22.444,166.88 42.444,186.88 ; 14.444,160.88 14.444,160.88 ; 14.444,160.88 22.444,168.88 42.444,188.88 ; 14.444,162.88 14.444,162.88 ; 14.444,162.88 18.444,166.88 42.444,190.88 ; 14.444,162.88 8.444,168.88 -13.556,190.88 -5.556,198.88 14.444,218.88 ; 14.444,164.88 12.444,166.88 -13.556,192.88 -5.556,200.88 14.444,220.88 ; 14.444,164.88 14.444,164.88 ; 14.444,164.88 18.444,168.88 42.444,192.88 ; 14.444,166.88 14.444,166.88 ; 14.444,166.88 14.444,166.88 ; 14.444,166.88 42.444,194.88 ; 14.444,166.88 12.444,168.88 -13.556,194.88 -9.556,198.88 14.444,222.88 ; 14.444,168.88 42.444,196.88 ; 14.444,168.88 16.444,166.88 42.444,140.88 ; 14.444,168.88 14.444,168.88 ; 14.444,170.88 16.444,168.88 42.444,142.88 ; 14.444,170.88 42.444,198.88 ; 14.444,170.88 14.444,170.88 ; 14.444,172.88 42.444,200.88 ; 14.444,172.88 14.444,172.88 ; 14.444,172.88 -11.556,198.88 -13.556,200.88 14.444,228.88 ; 14.444,172.88 20.444,166.88 42.444,144.88 ; 14.444,174.88 20.444,168.88 42.444,146.88 ; 14.444,174.88 -11.556,200.88 -13.556,202.88 14.444,230.88 ; 14.444,174.88 38.444,198.88 ; 14.444,176.88 -7.556,198.88 -13.556,204.88 14.444,232.88 ; 14.444,176.88 38.444,200.88 ; 14.444,176.88 24.444,166.88 ; 14.444,178.88 16.444,180.88 ; 14.444,178.88 24.444,168.88 ; 14.444,180.88 16.444,182.88 ; 14.444,180.88 28.444,166.88 42.444,152.88 ; 14.444,182.88 28.444,168.88 42.444,154.88 ; 14.444,182.88 16.444,184.88 ; 14.444,184.88 16.444,186.88 ; 14.444,184.88 32.444,166.88 ; 14.444,186.88 26.444,198.88 ; 14.444,186.88 32.444,168.88 ; 14.444,188.88 36.444,166.88 42.444,160.88 ; 14.444,188.88 26.444,200.88 ; 14.444,190.88 36.444,168.88 42.444,162.88 ; 14.444,190.88 22.444,198.88 42.444,218.88 ; 14.444,192.88 22.444,200.88 42.444,220.88 ; 14.444,192.88 14.444,192.88 ; 14.444,192.88 40.444,166.88 42.444,164.88 ; 14.444,194.88 18.444,198.88 42.444,222.88 ; 14.444,194.88 14.444,194.88 ; 14.444,194.88 40.444,168.88 42.444,166.88 ; 14.444,194.88 8.444,200.88 -13.556,222.88 -5.556,230.88 14.444,250.88 ; 14.444,196.88 14.444,196.88 ; 14.444,196.88 18.444,200.88 42.444,224.88 ; 14.444,196.88 12.444,198.88 -13.556,224.88 -5.556,232.88 14.444,252.88 ; 14.444,198.88 14.444,198.88 ; 14.444,198.88 14.444,198.88 ; 14.444,198.88 12.444,200.88 -13.556,226.88 -9.556,230.88 14.444,254.88 ; 14.444,198.88 42.444,226.88 ; 14.444,200.88 16.444,198.88 42.444,172.88 ; 14.444,200.88 42.444,228.88 ; 14.444,200.88 14.444,200.88 ; 14.444,202.88 42.444,230.88 ; 14.444,202.88 14.444,202.88 ; 14.444,202.88 16.444,200.88 42.444,174.88 ; 14.444,204.88 14.444,204.88 ; 14.444,204.88 42.444,232.88 ; 14.444,204.88 -11.556,230.88 -13.556,232.88 14.444,260.88 ; 14.444,204.88 20.444,198.88 42.444,176.88 ; 14.444,206.88 38.444,230.88 ; 14.444,206.88 20.444,200.88 42.444,178.88 ; 14.444,206.88 -11.556,232.88 -13.556,234.88 14.444,262.88 ; 14.444,208.88 -7.556,230.88 -13.556,236.88 14.444,264.88 ; 14.444,208.88 38.444,232.88 ; 14.444,208.88 24.444,198.88 ; 14.444,210.88 24.444,200.88 ; 14.444,210.88 16.444,212.88 ; 14.444,212.88 28.444,198.88 42.444,184.88 ; 14.444,212.88 16.444,214.88 ; 14.444,214.88 28.444,200.88 42.444,186.88 ; 14.444,214.88 16.444,216.88 ; 14.444,216.88 16.444,218.88 ; 14.444,216.88 32.444,198.88 ; 14.444,218.88 26.444,230.88 ; 14.444,218.88 32.444,200.88 ; 14.444,220.88 26.444,232.88 ; 14.444,220.88 36.444,198.88 42.444,192.88 ; 14.444,222.88 22.444,230.88 42.444,250.88 ; 14.444,222.88 36.444,200.88 42.444,194.88 ; 14.444,224.88 14.444,224.88 ; 14.444,224.88 22.444,232.88 42.444,252.88 ; 14.444,224.88 40.444,198.88 42.444,196.88 ; 14.444,226.88 40.444,200.88 42.444,198.88 ; 14.444,226.88 18.444,230.88 42.444,254.88 ; 14.444,226.88 14.444,226.88 ; 14.444,228.88 18.444,232.88 42.444,256.88 ; 14.444,228.88 14.444,228.88 ; 14.444,230.88 42.444,258.88 ; 14.444,230.88 14.444,230.88 ; 14.444,230.88 14.444,230.88 ; 14.444,232.88 14.444,232.88 ; 14.444,232.88 42.444,260.88 ; 14.444,232.88 16.444,230.88 42.444,204.88 ; 14.444,234.88 14.444,234.88 ; 14.444,234.88 42.444,262.88 ; 14.444,234.88 16.444,232.88 42.444,206.88 ; 14.444,236.88 14.444,236.88 ; 14.444,236.88 42.444,264.88 ; 14.444,236.88 20.444,230.88 42.444,208.88 ; 14.444,238.88 38.444,262.88 ; 14.444,238.88 20.444,232.88 42.444,210.88 ; 14.444,240.88 24.444,230.88 ; 14.444,240.88 38.444,264.88 ; 14.444,242.88 16.444,244.88 ; 14.444,242.88 24.444,232.88 ; 14.444,244.88 28.444,230.88 42.444,216.88 ; 14.444,244.88 16.444,246.88 ; 14.444,246.88 16.444,248.88 ; 14.444,246.88 28.444,232.88 42.444,218.88 ; 14.444,248.88 16.444,250.88 ; 14.444,248.88 32.444,230.88 ; 14.444,250.88 32.444,232.88 ; 14.444,250.88 26.444,262.88 ; 14.444,252.88 36.444,230.88 42.444,224.88 ; 14.444,252.88 26.444,264.88 ; 14.444,254.88 36.444,232.88 42.444,226.88 ; 14.444,256.88 14.444,256.88 ; 14.444,256.88 40.444,230.88 42.444,228.88 ; 14.444,258.88 42.444,286.88 ; 14.444,258.88 14.444,258.88 ; 14.444,258.88 40.444,232.88 42.444,230.88 ; 14.444,260.88 14.444,260.88 ; 14.444,260.88 42.444,288.88 ; 14.444,262.88 14.444,262.88 ; 14.444,262.88 14.444,262.88 ; 14.444,262.88 42.444,290.88 ; 14.444,262.88 14.444,262.88 ; 14.444,264.88 42.444,292.88 ; 14.444,264.88 14.444,264.88 ; 14.444,264.88 14.444,264.88 ; 14.444,266.88 38.444,290.88 ; 14.444,268.88 38.444,292.88 ; 14.444,270.88 16.444,272.88 ; 14.444,272.88 16.444,274.88 ; 14.444,274.88 16.444,276.88 ; 14.444,276.88 16.444,278.88 ; 14.444,278.88 26.444,290.88 ; 14.444,280.88 26.444,292.88 ; 14.444,284.88 14.444,284.88 ; 14.444,286.88 14.444,286.88 ; 14.444,288.88 14.444,288.88 ; 14.444,290.88 14.444,290.88 ; 14.444,290.88 14.444,290.88 ; 14.444,292.88 16.444,290.88 42.444,264.88 ; 14.444,292.88 14.444,292.88 ; 16.444,148.88 16.444,148.88 ; 16.444,148.88 34.444,166.88 42.444,174.88 ; 16.444,150.88 16.444,150.88 ; 16.444,150.88 34.444,168.88 42.444,176.88 ; 16.444,152.88 16.444,152.88 ; 16.444,152.88 30.444,166.88 42.444,178.88 ; 16.444,154.88 30.444,168.88 42.444,180.88 ; 16.444,154.88 16.444,154.88 ; 16.444,180.88 34.444,198.88 42.444,206.88 ; 16.444,180.88 16.444,180.88 ; 16.444,182.88 34.444,200.88 42.444,208.88 ; 16.444,182.88 16.444,182.88 ; 16.444,184.88 30.444,198.88 42.444,210.88 ; 16.444,184.88 16.444,184.88 ; 16.444,186.88 16.444,186.88 ; 16.444,186.88 30.444,200.88 42.444,212.88 ; 16.444,212.88 34.444,230.88 42.444,238.88 ; 16.444,212.88 16.444,212.88 ; 16.444,214.88 16.444,214.88 ; 16.444,214.88 34.444,232.88 42.444,240.88 ; 16.444,216.88 30.444,230.88 42.444,242.88 ; 16.444,216.88 16.444,216.88 ; 16.444,218.88 30.444,232.88 42.444,244.88 ; 16.444,218.88 16.444,218.88 ; 16.444,244.88 16.444,244.88 ; 16.444,246.88 16.444,246.88 ; 16.444,248.88 16.444,248.88 ; 16.444,250.88 16.444,250.88 ; 16.444,272.88 16.444,272.88 ; 16.444,274.88 16.444,274.88 ; 16.444,276.88 16.444,276.88 ; 16.444,278.88 16.444,278.88 ; 24.444,166.88 42.444,148.88 ; 24.444,166.88 24.444,166.88 ; 24.444,168.88 24.444,168.88 ; 24.444,168.88 42.444,150.88 ; 24.444,198.88 42.444,180.88 ; 24.444,198.88 24.444,198.88 ; 24.444,200.88 42.444,182.88 ; 24.444,200.88 24.444,200.88 ; 24.444,230.88 24.444,230.88 ; 24.444,230.88 42.444,212.88 ; 24.444,232.88 42.444,214.88 ; 24.444,232.88 24.444,232.88 ; 24.444,262.88 42.444,244.88 ; 24.444,262.88 24.444,262.88 ; 24.444,264.88 24.444,264.88 ; 24.444,264.88 42.444,246.88 ; 24.444,290.88 24.444,290.88 ; 24.444,290.88 42.444,272.88 ; 24.444,292.88 24.444,292.88 ; 24.444,292.88 42.444,274.88 ; 26.444,166.88 26.444,166.88 ; 26.444,166.88 42.444,182.88 ; 26.444,168.88 42.444,184.88 ; 26.444,168.88 26.444,168.88 ; 26.444,198.88 26.444,198.88 ; 26.444,198.88 42.444,214.88 ; 26.444,200.88 26.444,200.88 ; 26.444,200.88 42.444,216.88 ; 26.444,230.88 42.444,246.88 ; 26.444,230.88 26.444,230.88 ; 26.444,232.88 42.444,248.88 ; 26.444,232.88 26.444,232.88 ; 26.444,262.88 26.444,262.88 ; 26.444,264.88 26.444,264.88 ; 26.444,290.88 26.444,290.88 ; 26.444,292.88 26.444,292.88 ; 32.444,166.88 32.444,166.88 ; 32.444,166.88 42.444,156.88 ; 32.444,168.88 32.444,168.88 ; 32.444,168.88 42.444,158.88 ; 32.444,198.88 32.444,198.88 ; 32.444,198.88 42.444,188.88 ; 32.444,200.88 42.444,190.88 ; 32.444,200.88 32.444,200.88 ; 32.444,230.88 42.444,220.88 ; 32.444,230.88 32.444,230.88 ; 32.444,232.88 42.444,222.88 ; 32.444,232.88 32.444,232.88 ; 32.444,262.88 42.444,252.88 ; 32.444,262.88 32.444,262.88 ; 32.444,264.88 42.444,254.88 ; 32.444,264.88 32.444,264.88 ; 32.444,290.88 42.444,280.88 ; 32.444,290.88 32.444,290.88 ; 32.444,292.88 42.444,282.88 ; 32.444,292.88 32.444,292.88 ; 38.444,166.88 38.444,166.88 ; 38.444,166.88 42.444,170.88 ; 38.444,168.88 42.444,172.88 ; 38.444,168.88 38.444,168.88 ; 38.444,198.88 38.444,198.88 ; 38.444,198.88 42.444,202.88 ; 38.444,200.88 42.444,204.88 ; 38.444,200.88 38.444,200.88 ; 38.444,230.88 42.444,234.88 ; 38.444,230.88 38.444,230.88 ; 38.444,232.88 42.444,236.88 ; 38.444,232.88 38.444,232.88 ; 38.444,262.88 38.444,262.88 ; 38.444,264.88 38.444,264.88 ; 38.444,290.88 38.444,290.88 ; 38.444,292.88 38.444,292.88 ; 42.444,138.88 42.444,138.88 ; 42.444,140.88 42.444,140.88 ; 42.444,146.88 44.444,148.88 ; 42.444,148.88 44.444,150.88 ; 42.444,150.88 44.444,152.88 ; 42.444,152.88 44.444,154.88 ; 42.444,154.88 54.444,166.88 ; 42.444,156.88 54.444,168.88 ; 42.444,158.88 50.444,166.88 70.444,186.88 56.444,200.88 42.444,214.88 ; 42.444,160.88 42.444,160.88 ; 42.444,160.88 50.444,168.88 70.444,188.88 60.444,198.88 ; 42.444,162.88 42.444,162.88 ; 42.444,162.88 46.444,166.88 70.444,190.88 60.444,200.88 ; 42.444,164.88 42.444,164.88 ; 42.444,166.88 42.444,166.88 ; 42.444,166.88 42.444,166.88 ; 42.444,168.88 42.444,168.88 ; 42.444,170.88 42.444,170.88 ; 42.444,172.88 42.444,172.88 ; 42.444,176.88 52.444,166.88 ; 42.444,178.88 52.444,168.88 ; 42.444,178.88 44.444,180.88 ; 42.444,180.88 44.444,182.88 ; 42.444,182.88 44.444,184.88 ; 42.444,184.88 60.444,166.88 ; 42.444,184.88 44.444,186.88 ; 42.444,186.88 60.444,168.88 ; 42.444,186.88 54.444,198.88 ; 42.444,188.88 54.444,200.88 ; 42.444,190.88 50.444,198.88 70.444,218.88 56.444,232.88 42.444,246.88 ; 42.444,192.88 50.444,200.88 70.444,220.88 60.444,230.88 ; 42.444,192.88 42.444,192.88 ; 42.444,194.88 46.444,198.88 70.444,222.88 60.444,232.88 ; 42.444,194.88 42.444,194.88 ; 42.444,196.88 42.444,196.88 ; 42.444,198.88 42.444,198.88 ; 42.444,198.88 42.444,198.88 ; 42.444,200.88 42.444,200.88 ; 42.444,202.88 42.444,202.88 ; 42.444,204.88 42.444,204.88 ; 42.444,206.88 48.444,200.88 70.444,178.88 58.444,166.88 44.444,152.88 ; 42.444,208.88 52.444,198.88 ; 42.444,210.88 44.444,212.88 ; 42.444,210.88 52.444,200.88 ; 42.444,212.88 44.444,214.88 ; 42.444,212.88 56.444,198.88 70.444,184.88 54.444,168.88 ; 42.444,214.88 44.444,216.88 ; 42.444,216.88 44.444,218.88 ; 42.444,216.88 60.444,198.88 ; 42.444,218.88 54.444,230.88 ; 42.444,218.88 60.444,200.88 ; 42.444,220.88 54.444,232.88 ; 42.444,224.88 50.444,232.88 70.444,252.88 60.444,262.88 ; 42.444,224.88 42.444,224.88 ; 42.444,226.88 46.444,230.88 70.444,254.88 60.444,264.88 ; 42.444,226.88 42.444,226.88 ; 42.444,228.88 42.444,228.88 ; 42.444,230.88 42.444,230.88 ; 42.444,230.88 42.444,230.88 ; 42.444,232.88 42.444,232.88 ; 42.444,234.88 42.444,234.88 ; 42.444,236.88 70.444,264.88 44.444,290.88 42.444,292.88 ; 42.444,236.88 42.444,236.88 ; 42.444,238.88 48.444,232.88 70.444,210.88 58.444,198.88 44.444,184.88 ; 42.444,240.88 52.444,230.88 ; 42.444,242.88 44.444,244.88 ; 42.444,242.88 52.444,232.88 ; 42.444,244.88 44.444,246.88 ; 42.444,244.88 56.444,230.88 70.444,216.88 54.444,200.88 ; 42.444,246.88 44.444,248.88 ; 42.444,248.88 44.444,250.88 ; 42.444,248.88 60.444,230.88 ; 42.444,250.88 54.444,262.88 ; 42.444,250.88 60.444,232.88 ; 42.444,252.88 54.444,264.88 ; 42.444,256.88 42.444,256.88 ; 42.444,258.88 42.444,258.88 ; 42.444,260.88 42.444,260.88 ; 42.444,262.88 42.444,262.88 ; 42.444,262.88 42.444,262.88 ; 42.444,262.88 42.444,262.88 ; 42.444,264.88 42.444,264.88 ; 42.444,264.88 42.444,264.88 ; 42.444,270.88 44.444,272.88 ; 42.444,272.88 44.444,274.88 ; 42.444,274.88 44.444,276.88 ; 42.444,276.88 44.444,278.88 ; 42.444,278.88 54.444,290.88 ; 42.444,280.88 54.444,292.88 ; 42.444,284.88 42.444,284.88 ; 42.444,286.88 42.444,286.88 ; 42.444,288.88 42.444,288.88 ; 42.444,290.88 42.444,290.88 ; 42.444,290.88 42.444,290.88 ; 42.444,292.88 42.444,292.88 ; 44.444,148.88 44.444,148.88 ; 44.444,150.88 44.444,150.88 ; 44.444,152.88 44.444,152.88 ; 44.444,154.88 44.444,154.88 ; 44.444,154.88 58.444,168.88 70.444,180.88 52.444,198.88 ; 44.444,180.88 44.444,180.88 ; 44.444,182.88 44.444,182.88 ; 44.444,184.88 44.444,184.88 ; 44.444,186.88 44.444,186.88 ; 44.444,186.88 58.444,200.88 70.444,212.88 52.444,230.88 ; 44.444,212.88 44.444,212.88 ; 44.444,214.88 44.444,214.88 ; 44.444,216.88 44.444,216.88 ; 44.444,218.88 44.444,218.88 ; 44.444,218.88 58.444,232.88 70.444,244.88 52.444,262.88 ; 44.444,244.88 44.444,244.88 ; 44.444,246.88 44.444,246.88 ; 44.444,248.88 44.444,248.88 ; 44.444,250.88 44.444,250.88 ; 44.444,272.88 44.444,272.88 ; 44.444,274.88 44.444,274.88 ; 44.444,276.88 44.444,276.88 ; 44.444,278.88 44.444,278.88 ; 52.444,166.88 52.444,166.88 ; 52.444,168.88 52.444,168.88 ; 52.444,198.88 52.444,198.88 ; 52.444,200.88 52.444,200.88 ; 52.444,200.88 70.444,182.88 54.444,166.88 ; 52.444,230.88 52.444,230.88 ; 52.444,232.88 70.444,214.88 54.444,198.88 ; 52.444,232.88 52.444,232.88 ; 52.444,262.88 52.444,262.88 ; 52.444,264.88 52.444,264.88 ; 52.444,264.88 70.444,246.88 54.444,230.88 ; 52.444,290.88 52.444,290.88 ; 52.444,292.88 52.444,292.88 ; 54.444,166.88 54.444,166.88 ; 54.444,168.88 54.444,168.88 ; 54.444,198.88 54.444,198.88 ; 54.444,200.88 54.444,200.88 ; 54.444,230.88 54.444,230.88 ; 54.444,232.88 54.444,232.88 ; 54.444,262.88 54.444,262.88 ; 54.444,264.88 54.444,264.88 ; 54.444,290.88 54.444,290.88 ; 54.444,292.88 54.444,292.88 ; 60.444,166.88 60.444,166.88 ; 60.444,168.88 60.444,168.88 ; 60.444,198.88 60.444,198.88 ; 60.444,200.88 60.444,200.88 ; 60.444,230.88 60.444,230.88 ; 60.444,232.88 60.444,232.88 ; 60.444,262.88 60.444,262.88 ; 60.444,264.88 60.444,264.88 ; 60.444,290.88 60.444,290.88 ; 60.444,292.88 60.444,292.88

## Silkscreen, mask and mechanical layers (free items; w line width, h text height)
TopOverlay:
  drawing of 263 lines, arcs and shapes, not listed
  text "AdapterSampler DIOT / V.P_version / WUT ISE .ModifiedDate" at 0.398,-2.217 h1.02
M1 Board Shape:
  lines w0.1: -5.9,3.65 -3.57,3.65 -3.57,-5.55 28.43,-5.55 28.43,94.45 -3.469,94.45 -3.57,94.349 -3.57,85.025 -5.9,82.695 -5.9,3.65
M2 Old Board Shape:
  lines w0.1: -6.114,-19.788 -6.114,102.894
Mechanical4:
  lines w1: 27.444,-0.12 27.444,89.88 102.444,89.88 102.444,-0.12 27.444,-0.12 ; 113.444,53.88 113.444,88.88 153.444,88.88 153.444,53.88 113.444,53.88
Top Component Outline:
  lines w0.2: -5.2,3.925 -2.2,3.925 cw(c-2.2,1.925) -0.2,1.925 -0.2,-2.619 1.731,-4.55 26.93,-4.55 28.43,-3.05 28.43,4.55 25.93,6.95 19.13,6.95 15.2,10.88 15.2,78.02 19.13,81.95 25.93,81.95 28.43,84.35 28.43,91.95 26.93,93.45 -3.269,93.45 -5.2,91.519 -5.2,3.925 ; 26.006,81.916 26.006,81.916
Mechanical13:
  lines w0.01: -6.352,-6.334 -6.352,75.374

## Text inside footprints (layer, text, board x,y; h text height)
J1: Mechanical14 "Board Edge" at -5.774,80.142 h1 r90
J5: Mechanical14 "Board Edge" at -5.774,60.142 h1 r90
J10: Mechanical14 "Board Edge" at -5.774,40.142 h1 r90
J14: Mechanical14 "Board Edge" at -5.774,20.142 h1 r90